# Altium PCB smartbox.PcbDoc
Units mil, origin at the board's own origin, x right, y up, seen from the top; angles counter-clockwise.
Board outline 4920.03 x 1045.03 mil, 2 copper layers (Top Layer, Bottom Layer); 39 components, 23 nets, 134 pads, 90 vias.
Unrouted connection lines stored in the file: 20.
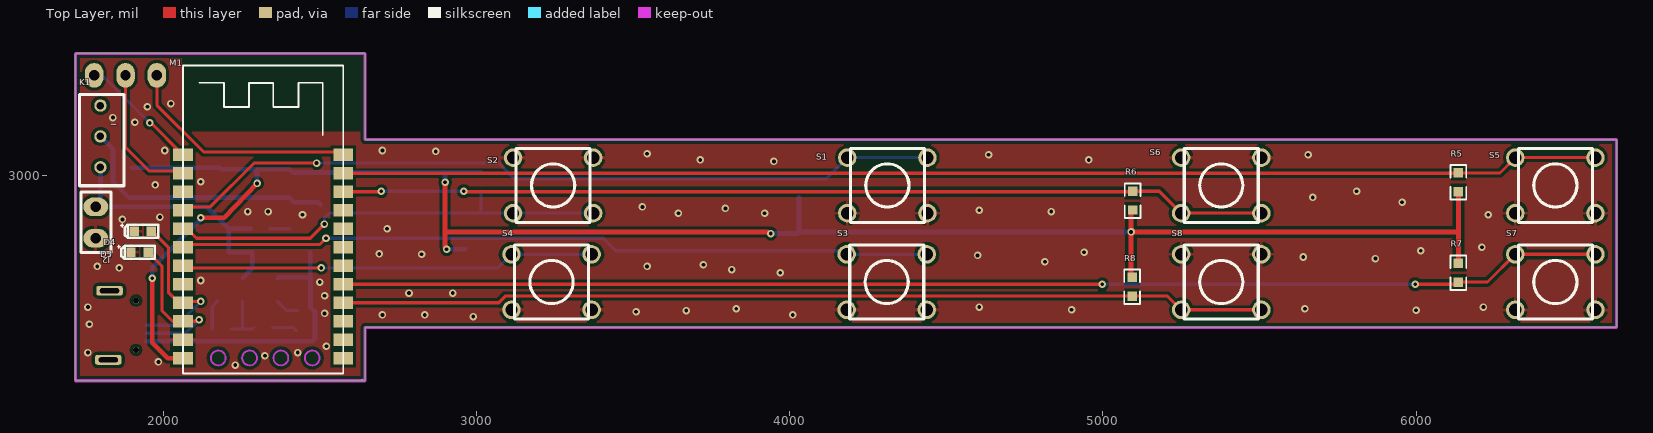
[diagram p0: Top Layer view]
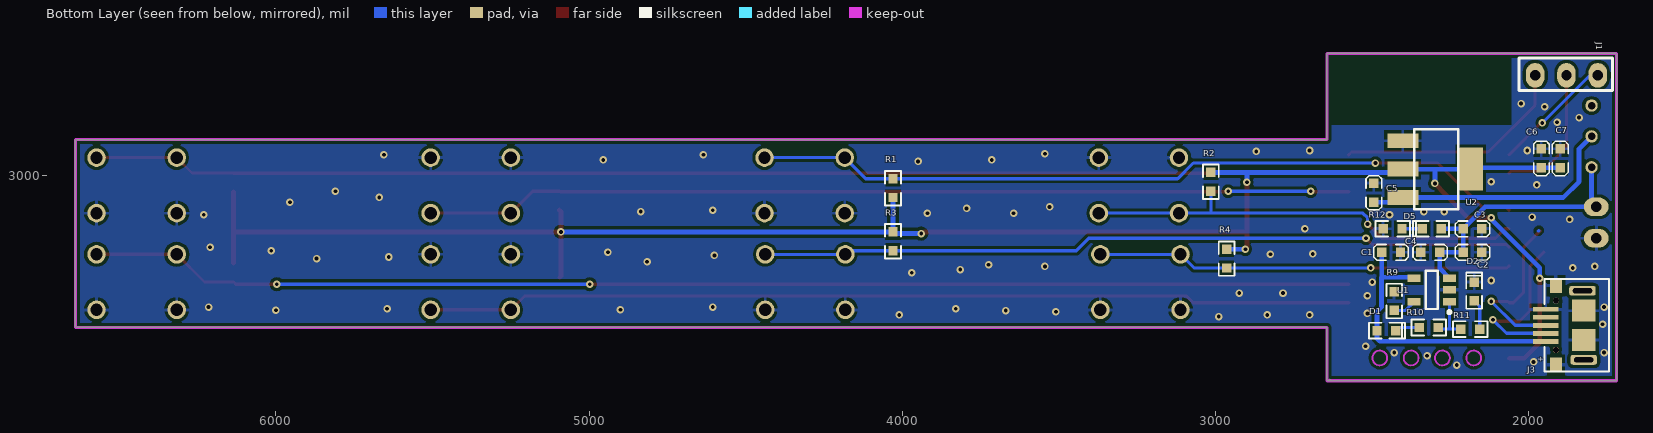
[diagram p1: Bottom Layer view, seen from below]
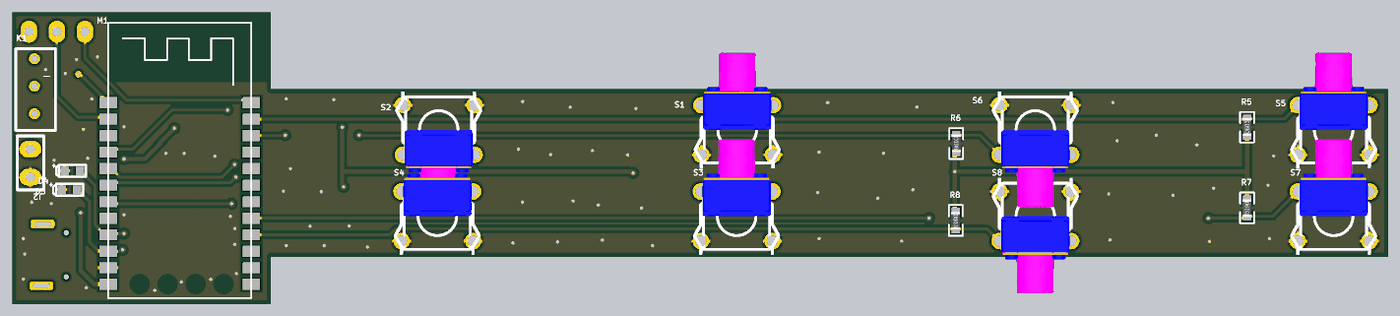
[diagram p2: 3D render of the assembled board from above, using the file's embedded part models]
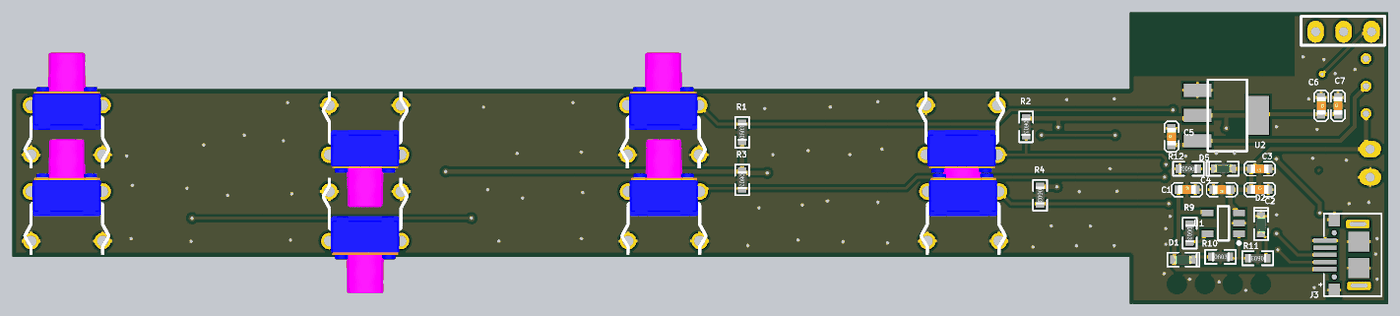
[diagram p3: 3D render of the assembled board from below, using the file's embedded part models]

## Layer stack, top to bottom
Top Solder: solder mask 0.4, Solder Resist, Dk 3.5
Top Layer: signal copper 1.4
Dielectric 1: dielectric 12.6, FR-4, Dk 4.8
Bottom Layer: signal copper 1.4
Bottom Solder: solder mask 0.4, Solder Resist, Dk 3.5

## Board outline
1725,2344.99 cw(c1725,2350) 1719.98,2350 1719.98,3385 cw(c1725,3385) 1725,3390.01 2640,3390.01 cw(c2640,3385) 2645.01,3385 2645.01,3115.01 6635,3115.02 cw(c6635,3110) 6640.02,3110 6640.02,2520 cw(c6635,2520) 6635,2514.99 2645.01,2514.99 2645.01,2350 cw(c2640,2350) 2635,2349.61 cw(c2630,2350) 2630,2344.99

## Design rules (kind name [scope] priority, off if disabled: settings)
Clearance [All] p1: gap=10 ignorepadtopadclearanceinfootprint=TRUE except(0: Arc-Hole Track-Hole SMDPad-Hole THPad-Hole Via-Hole Fill-Hole Poly-Hole Region-Hole Text-Hole)
PolygonConnect PolygonConnect_1 [IsVia] p1: connectstyle=Direct reliefconductorwidth=10 reliefentries=4 polygonreliefangle="90 Angle" airgapwidth=10
PolygonConnect [All] p2: connectstyle=Relief reliefconductorwidth=10 reliefentries=4 polygonreliefangle="90 Angle" airgapwidth=10
RoutingVias [All] p1: holewidth=28 width=50 viastyle="Through Hole" minholewidth=28 minwidth=50 maxholewidth=28 maxwidth=50
SolderMaskExpansion [All] p1: expansion=4
Width pow [InNetClass('pow')] p1: maxlimit=20 minlimit=10 preferedwidth=15
Width [All] p2: maxlimit=10 minlimit=10 preferedwidth=10
30 further rules are at their usual default settings.

## Classes and differential pairs
net class pow: +3.3V BT2 VBUS VIN

## Components (designator, comment, footprint, x,y, rotation, side; value= is the part's Value field where it differs from the comment)
C1 "475K16V" C0603 2470,2755 r180 bottom
C2 "106K50V" C0603 2210,2755 r180 bottom
C3 "104K50V" C0603 2150,2830 r0 bottom
C4 "106K50V" C0603 2285,2755 r0 bottom
C5 "104K50V" C0603 2495,2915 r90 bottom
C6 "106K50V" C0603 1960,3085 r270 bottom
C7 "104K50V" C0603 1900,3025 r90 bottom
D1 "LED0603G" D-LED0603G 2485,2505 r180 bottom
D2 "LED0603G" D-LED0603G 2175,2600 r90 bottom
D3 "ESDA_TR1/0603" HS_0603D 1925,2755 r0 top
D4 "ESDA_TR1/0603" HS_0603D 1935,2822.5 r0 top
D5 "LED0603G" D-LED0603G 2280,2830 r0 bottom
J1 "J-D2.54-1*3" D2.54-1*3P 1780,3320 r0 bottom
J2 "J-D2.54-1*2" D2.54-1*2P 1785,2900 r270 top
J3 "USB-MINI-SOCKET" "MICRO-USB - 5.9" 1946.06,2470.83 r90 bottom
K1 "SS-12D00" SS-12D00 1800,3223.43 r270 top
M1 "cc2540" CC25XXSM 2319.09,2741.69 r0 top
R1 "1KF" R0603 4030,2930 r90 bottom
R2 "1KF" R0603 3015,3010 r270 bottom
R3 "1KF" R0603 4030,2820 r270 bottom
R4 "1KF" R0603 2965,2765 r270 bottom
R5 "1KF" R0603 6135,2948.39 r90 top
R6 "1KF" R0603 5095,2890 r90 top
R7 "1KF" R0603 6135,2720 r270 top
R8 "1KF" R0603 5093.39,2675 r270 top
R9 "R0603-15KF" R0603 2430,2629.65 r270 bottom
R10 "470RF" R0603 2350,2515 r180 bottom
R11 "470RF" R0603 2157,2510 r0 bottom
R12 "1KF" R0603 2405,2830 r0 bottom
S1 "SKHHBVA010" S-SKHHBVA010 4312.05,2968.58 r0 top
S2 "SKHHBVA010" S-SKHHBVA010 3245,2968.58 r180 top
S3 "SKHHBVA010" S-SKHHBVA010 4310,2660 r0 top
S4 "SKHHBVA010" S-SKHHBVA010 3240,2660 r0 top
S5 "SKHHBVA010" S-SKHHBVA010 6444.46,2968.58 r0 top
S6 "SKHHBVA010" S-SKHHBVA010 5377.95,2968.58 r180 top
S7 "SKHHBVA010" S-SKHHBVA010 6444.46,2660 r0 top
S8 "SKHHBVA010" S-SKHHBVA010 5377.95,2660 r180 top
U1 "MCP73831" SOT23-5N 2310,2635 r0 bottom
U2 "AMS1117_3.3V" SOT-223 2402.4,3020.55 r270 bottom

## Footprints (in the part's own frame and the unit in brackets; to place one, negate y for a bottom-side part, rotate by r counter-clockwise, add the part's x,y. Pads: shape width x height; smd on the part's side, far side on the other; paste and mask are expansions set on the pad)
C0603 [mil]
  rect 30x30 smd: 1(0,0) 2(60,0)
  silkscreen extent -25,-25 85,25, body extent -1,-15 61,16, height 12
CC25XXSM [mm]
  rect 1.6x1 smd: 1(-6.5,8.25) 2(-6.5,6.75) 3(-6.5,5.25) 4(-6.5,3.75) 5(-6.5,2.25) 6(-6.5,0.75) 7(-6.5,-0.75) 8(-6.5,-2.25) 9(-6.5,-3.75) 10(-6.5,-5.25) 11(-6.5,-6.75) 12(-6.5,-8.25) 13(6.5,-8.25) 14(6.5,-6.75) 15(6.5,-5.25) 16(6.5,-3.75) 17(6.5,-2.25) 18(6.5,-0.75) 19(6.5,0.75) 20(6.5,2.25) 21(6.5,3.75) 22(6.5,5.25) 23(6.5,6.75) 24(6.5,8.25)
  Keep-Out Layer circle w0.152: c3.985,-8.23 r0.6
  Keep-Out Layer circle w0.152: c1.445,-8.23 r0.6
  Keep-Out Layer circle w0.152: c-1.095,-8.23 r0.6
  Keep-Out Layer circle w0.152: c-3.635,-8.23 r0.6
  silkscreen extent -6.5,-9.5 6.5,15.5
D2.54-1*2P [mm]
  oval 1.5x2 hole 0.838: 1(0,0) 2(2.54,0)
  silkscreen extent -1.2,-1.2 3.7,1.23, body extent -1.1,-1.3 3.6,1.24, height 10
D2.54-1*3P [mm]
  oval 1.5x2 hole 0.838: 1(0,0) 2(2.54,0) 3(5.08,0)
  silkscreen extent -1.2,-1.4 6.4,1.23, body extent -1.1,-1.38 6.3,1.23, height 10
D-LED0603G [mil]
  rect 30x30 smd: 1(0,0) 2(60,0)
  silkscreen extent -25,-25 90,25, body extent -2,-16 62,15, height 24
HS_0603D [mil]
  rect 30x30 smd: 1(-27.5,0) 2(27.5,0)
  silkscreen extent -70,-21 49,23
"MICRO-USB - 5.9" [mm]
  rrect50% 0.8x2.15 hole 0.4 slot 1.55 at 90 deg: 0(-1.5,-3.075) 0(4.1,-2.975)
  rect 0.4x2.1 smd: 1(0,0) 2(0.65,0) 3(1.3,0) 4(1.95,0) 5(2.6,0)
  rect 1.2x1 smd: 6(-1.9,-0.825) 7(4.5,-0.825)
  rect 1.8x1.9 smd: 8(0.106,-3.075) 9(2.493,-3.075)
  round 0.5 hole 0.5 unplated: ""(-0.7,-0.825) ""(3.3,-0.825)
  silkscreen extent -2.45,-5.13 5.05,0.12
R0603 [mil]
  rect 30x30 smd: 1(0,0) 2(60,0)
  silkscreen extent -25,-25 85,25, body extent 0,-16 62,15, height 18
S-SKHHBVA010 [mm]
  round 1.5 hole 1: 1(-3.25,2.25) 1(3.25,2.25) 2(-3.25,-2.25) 2(3.25,-2.25)
  silkscreen extent -3,-3 3,3, body extent -3.95,-3.1 3.95,3.1, height 7
SOT23-5N [mm] "SOT23, 5-Leads, Body 2.90x2.70mm, Pitch 0.95mm, IPC Medium Density"
  rect 1.05x0.6 smd: 1(-1.425,0.95) 2(-1.425,0) 3(-1.425,-0.95) 4(1.425,-0.95) 5(1.425,0.95)
  silkscreen extent -1.55,-1.55 0.5,1.92, body extent -0.9,-1.55 0.9,1.55, height 1.45
SOT-223 [mm]
  rect 1.2x2.5 smd: 1(-2.3,0) 2(0,0) 3(2.3,0)
  rect 3.5x2 smd: 2(0,5.5)
  silkscreen extent -3.25,0.94 3.25,4.5
SS-12D00 [mm] "SS-12D00(1P2T) 立式 柄高5MM"
  round 1 hole 0.6: 1(0,0) 2(2.5,0) 3(5,0)
  silkscreen extent -0.9,-1.7 6.5,1.9

## Part data
C1: library part C0603X7R-475K16V, "贴片电容-陶瓷", =无编, 规格型号=4.7uF±10%_1
C2 C4 C6: library part C0603X7R-106K50V, "贴片电容-陶瓷", =无编, 规格型号=10uF±10%_5
C3 C5 C7: library part C0603X7R-104K50V, "贴片电容-陶瓷", =无编, 规格型号=100nF±10%_5
D1 D2 D5: library part DLED-0603-G, "贴片二极管-LED", 规格型号=0
D3 D4: library part "D Zener", "Zener Diode"
J1: library part J-D2.54-1*3单排
J2: library part J-D2.54-1*2单排
J3: library part J-USB-MINI-SOCKET, "USB-A卧式插座"
K1: library part "SS-12D00(1P2T) 立式 柄高5MM"
R1 R2 R3 R4 R5 R6 R7 R8 R12: library part R0603-1KF, "贴片电阻-通用", 规格型号=1K±1%_1/10W
R9: "贴片电容-通用"
R10 R11: library part R0603-470RF, "贴片电阻-通用", 规格型号=470R±1%_1/10W
S1 S2 S3 S4 S5 S6 S7 S8: library part S-SKHHBVA010, "轻触按键", 规格型号="S-SKHHBVA010 T"
U1: "charge IC"
U2: library part AMS1117-3.3V

## Via types
v1: diameter 24, hole 12, Top Layer to Bottom Layer, tented both sides, 89 vias
v2: diameter 24, hole 12, Top Layer to Bottom Layer, 1 vias

## Nets (pads, with @x,y where several pads share a name; then routed paths per layer and width w, separated by ;. In a path a pad name is that pad's centre, name@x,y a point inside that pad or via, vN(x,y) a via of type N, cw(c..) or ccw(c..) an arc to the next point about the centre after c; other vN are vias at no path point)
+3.3V: C6.2 C7.1 M1.12 R1.1 R2.1 R3.1 R4.1 R5.1 R6.1 R7.1 R8.1 U2.2 | length 6069.7
  Top Layer w15: v1(1965,2672.4) 1965,2466.72 2014.83,2416.89 M1.12 ; v1(2120,2865) 2195,2865 v1(2300,2975) ; v1(2900,2978.43) 2900,2820 ; v1(2905,2765) 2900,2770 2900,2820 ; v1@3930,2820 2900,2820 ; R8.1 5090,2678.39 v1(5090,2820) ; R6.1 5090,2885 v1(5090,2820) ; R7.1 6135,2825 ; R5.1 6135,2825 ; v1(5090,2820) 6130,2820 6135,2825
  Bottom Layer w15: C7.1 C6.2 2181.42,3025 2185.87,3020.55 2300,3020.55 ; v1(1965,2672.4) 1965,2705 2117.5,2857.5 v1@2117.5,2867.5 ; v1(2300,2975) 2300,3020.55 ; v1(2900,2978.43) 2900,3010 ; v1(2905,2765) R4.1 ; R2.1 2900,3010 ; v1(3940,2815) 4025,2815 R3.1 ; R1.1 R3.1 ; v1(5090,2820) R3.1 ; 2300,3020.55 2402.4,3020.55 2412.95,3010 2900,3010
BT2: C2.1 C3.2 C4.1 D5.1 J2.1 K1.3 U1.3 | length 902.3
  Bottom Layer w15: K1.3 1800,2915 J2.1 2140,2900 C3.2 ; U1.3 2285,2703.5 C4.1 C2.1 C3.2 ; D5.1 C3.2
DC: J1.2 M1.2 | length 447.4
  Top Layer w10: J1.2 1880,3090 1955,3015 2055.63,3015 M1.2
DD: J1.1 M1.1 | length 397.6
  Top Layer w10: v2@1955,3174.68 v2@1957,3172.69 ; v2(1957,3168) v2@1957,3172.69 ; M1.1 v2@1957,3172.69
  Bottom Layer w10: J1.1 1805,3320 v2(1957,3168)
GND: C1.2 C2.2 C3.1 C4.2 C5.2 C6.1 C7.2 D2.2 D3.1 D4.1 J2.2 J3.5 J3.6 J3.7 J3.8 J3.9 M1.11 R9.1 R12.2 S1.2 S2.2 S3.2 S4.2 S5.2 S6.2 S7.2 S8.2 U1.2 U2.1
  other v1: 2230,2395 1985,2405 2325,2425 1760,2435 2430,2435 2521.5,2455 1765,2525 2990,2550 2700,2555 2835,2555 4010,2555 2515.59,2560 3510,2565 3670,2569 6000,2570 4900,2571.42 3830,2575 5645,2575 1760,2580 4605,2580 6215,2580 2515.59,2615.95 2785,2625 2925,2625 2500,2660 2120,2665 3970,2690 3815,2700 1860,2705 1790,2710 3545,2710 3725,2715 4815,2725 5870,2735 5640,2740 4600,2745 2825,2748.58 2690,2750 4940,2755 6015,2760 6210,2771.22 2715,2830 1870,2860 1990,2867.5 2445,2875 6230,2875 3645,2880 3920,2880 2270,2885 2335,2885 4835,2885 4605,2889.33 3795,2895 3530,2900 5955,2915 5670,2930 5810,2950 1975,2970 2120,2980 3950,3045 3715,3050 4955,3050 4635,3066.5 5655,3066.5 3545,3070 2870,3076.85 2005,3080 2700,3080 1910,3170 1840,3185 1950,3220 2025,3230
NetD1_2: D1.2 R10.1 | length 79.1
  Bottom Layer w10: R10.1 2415,2515 D1.2
NetD2_1: D2.1 R11.1 | length 97.5
  Bottom Layer w10: R11.1 2157,2582 D2.1
NetD5_2: D5.2 R12.1 | length 65
  Bottom Layer w10: D5.2 R12.1
NetR9_2: R9.2 U1.5 | length 75.5
  Bottom Layer w10: U1.5 2394.05,2569.65 R9.2
NetR10_2: R10.2 R11.2 U1.1 | length 163.1
  Bottom Layer w10: R11.2 2255,2510 ; U1.1 2253.9,2511.1 2255,2510 ; R10.2 2285,2510 2255,2510
P0: M1.23 R5.2 S5.1 | length 4017.6
  Top Layer w10: M1.23 R5.2@6135,3007.44 ; R5.2 6267.72,3008.39 6316.5,3057.17 S5.1@6572.41,3057.17
P1: M1.22 R6.2 S6.1 | length 2961.9
  Top Layer w10: M1.22 2695,2948.39 v1(2696.61,2950) ; v1(2960,2950) 2961.61,2948.39 3050,2948.39 5093.39,2948.39 R6.2 5180,2950 5250,2880 S6.1@5505.91,2880
  Bottom Layer w10: v1(2696.61,2950) v1(2960,2950)
P6: M1.17 R7.2 S7.1 | length 4037
  Top Layer w10: M1.17 v1(4998.11,2653.11) ; v1(5996.89,2653.11) 6128.11,2653.11 R7.2 6227.92,2660 6316.5,2748.58 S7.1@6572.41,2748.58
  Bottom Layer w10: v1(4998.11,2653.11) v1(5996.89,2653.11)
P7: M1.16 R8.2 S8.1 | length 2959.2
  Top Layer w10: M1.16 3071.71,2594.06 3093.6,2615.95 3386.4,2615.95 3387.34,2615 4162.66,2615 4163.6,2615.95 4456.4,2615.95 4457.34,2615 R8.2 5206.42,2615 5250,2571.42 S8.1@5505.91,2571.42
P14: M1.7 R4.2 S4.1 | length 1325.8
  Top Layer w10: M1.7 2070.35,2705 v1(2505,2705)
  Bottom Layer w10: v1(2505,2705) R4.2 3068.47,2705 3112.05,2748.58 S4.1@3367.95,2748.58
P15: M1.6 R3.2 S3.1 | length 2408
  Top Layer w10: M1.6 2071.97,2780 2500,2780 v1(2520,2800)
  Bottom Layer w10: v1(2520,2800) 3405,2800 3445,2760 R3.2 4170.63,2760 4182.05,2748.58 S3.1@4437.95,2748.58
P16: M1.5 R2.2 S2.1 | length 1437.2
  Top Layer w10: M1.5 2076.53,2830.28 2106.8,2800 2470,2800 v1(2515,2845)
  Bottom Layer w10: v1(2515,2845) 2515,2865 2530,2880 3015,2880 ; R2.2 3015,2880 ; S2.1@3372.95,2880 3117.04,2880 3015,2880
P17: M1.4 R1.2 S1.1 | length 2487.8
  Top Layer w10: M1.4 2073.86,2900 2150.67,2900 2290.67,3040 v1(2490,3040)
  Bottom Layer w10: v1(2490,3040) 3071.24,3040 3121.24,2990 R1.2 4116.93,2990 4184.09,3057.17 S1.1@4440,3057.17
RESET: J1.3 M1.24 | length 755.7
  Top Layer w10: J1.3 1980,3225 2130,3075 2566.5,3075 M1.24
USB_M/SDA: D3.2 J3.2 M1.10 | length 526.2
  Top Layer w10: D3.2 1996.69,2710.81 1996.69,2568.31 2030,2535 M1.10 2110,2535 v1(2115,2540)
  Bottom Layer w10: J3.2 2071.43,2496.43 v1(2115,2540)
USB_P/SCL: D4.2 J3.3 M1.9 | length 546.9
  Top Layer w10: D4.2 1965,2822.5 2016.69,2770.81 2016.69,2627.21 2049.85,2594.06 M1.9 2067.28,2598.15 v1(2120,2598.15)
  Bottom Layer w10: J3.3 2043.87,2522.02 v1(2120,2598.15) ; 1967.5,2825 1970,2822.5
VBUS: C1.1 D1.1 J3.1 U1.4 | length 928.9
  Bottom Layer w15: J3.1 2475.83,2470.83 2485,2480 D1.1 2485,2565 2470.5,2579.5 2470.5,2674.5 2470,2675 ; U1.4 2368.7,2675 2470,2675 ; C1.1 2470,2675
VIN: C5.1 K1.2 U2.3 | length 859.2
  Bottom Layer w15: K1.2@1800,3130 K1.2 1840,3085 1840,2980 1890,2930 U2.3 2417.4,2915 C5.1 C5.1@2502.57,2907.43
pads on no net: J3. J3.0 J3.4 K1.1 M1.3 M1.8 M1.13 M1.14 M1.15 M1.18 M1.19 M1.20 M1.21

## Polygon pours and split planes (outlines as drawn)
GND on Top Layer "Top Layer-No Net" (solid, remove dead copper, pour order 12): 2060,3375 2060,3149.37 2055.63,3145 2060.63,3140 2640,3140 2640,3100 6635,3100 6635,2510 6625,2520 2640,2520 2640,2340 1725,2340 1725,3375
GND on Bottom Layer "Bottom Layer-No Net" (solid, remove dead copper, pour order 14): 1720,3390 2055,3390 2055,3160 2635,3160 2635,3115 6630,3115 6630,2525 2635,2525 2635,2355 1720,2355

## Keep-outs
Keep-Out Layer:
  lines w10: 1720,2345 1720,3390 2645,3390 2645,3115 6640,3115 6640,2515 2645,2515 2645,2345 1720,2345

## Dimensions
1725,3535 to 6635,3485 on Mechanical 1
1610,2345 to 1635,3390 on Mechanical 1

## Text inside footprints (layer, text, board x,y; h text height)
J3: Bottom Overlay "+" at 1956,2403.38 h15.75 r270
K1: Top Overlay "I" at 1833.46,3167.32 h19.68 r270